# Altium PCB PCB6.PcbDoc
Units mil, origin at the board's own origin, x right, y up, seen from the top; angles counter-clockwise.
Board outline 5000 x 3000 mil, 2 copper layers (Top Layer, Bottom Layer); 20 components, 9 nets, 66 pads, 0 vias.
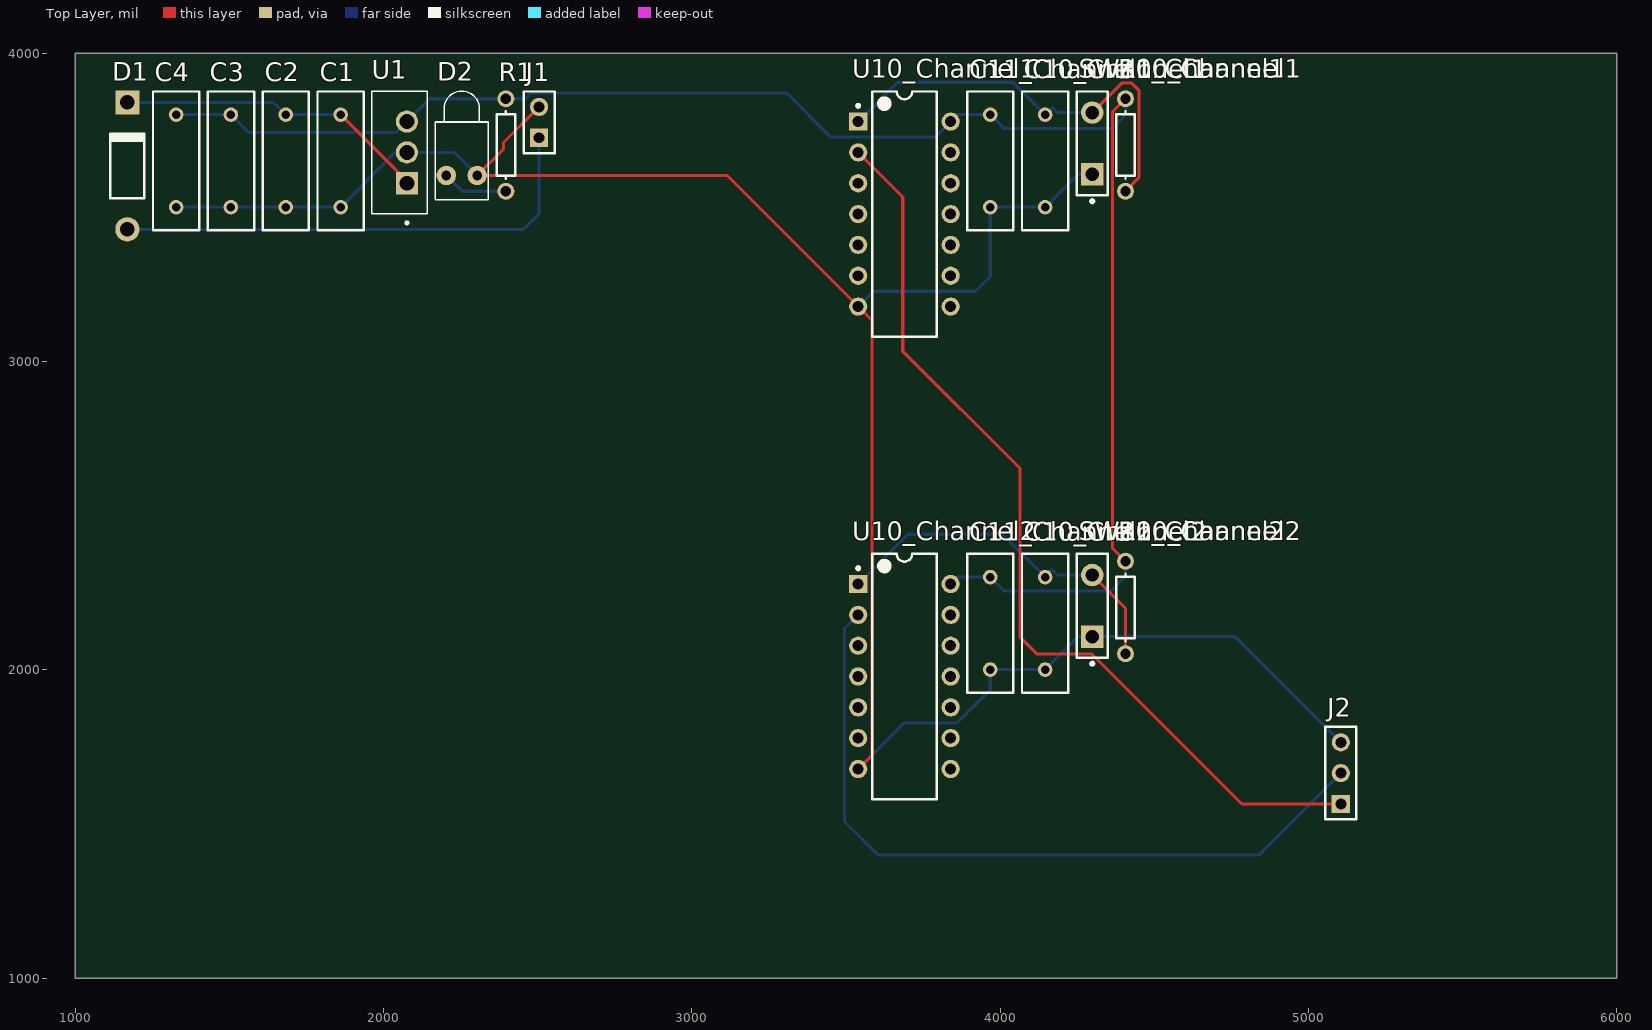
[diagram p0: Top Layer view]
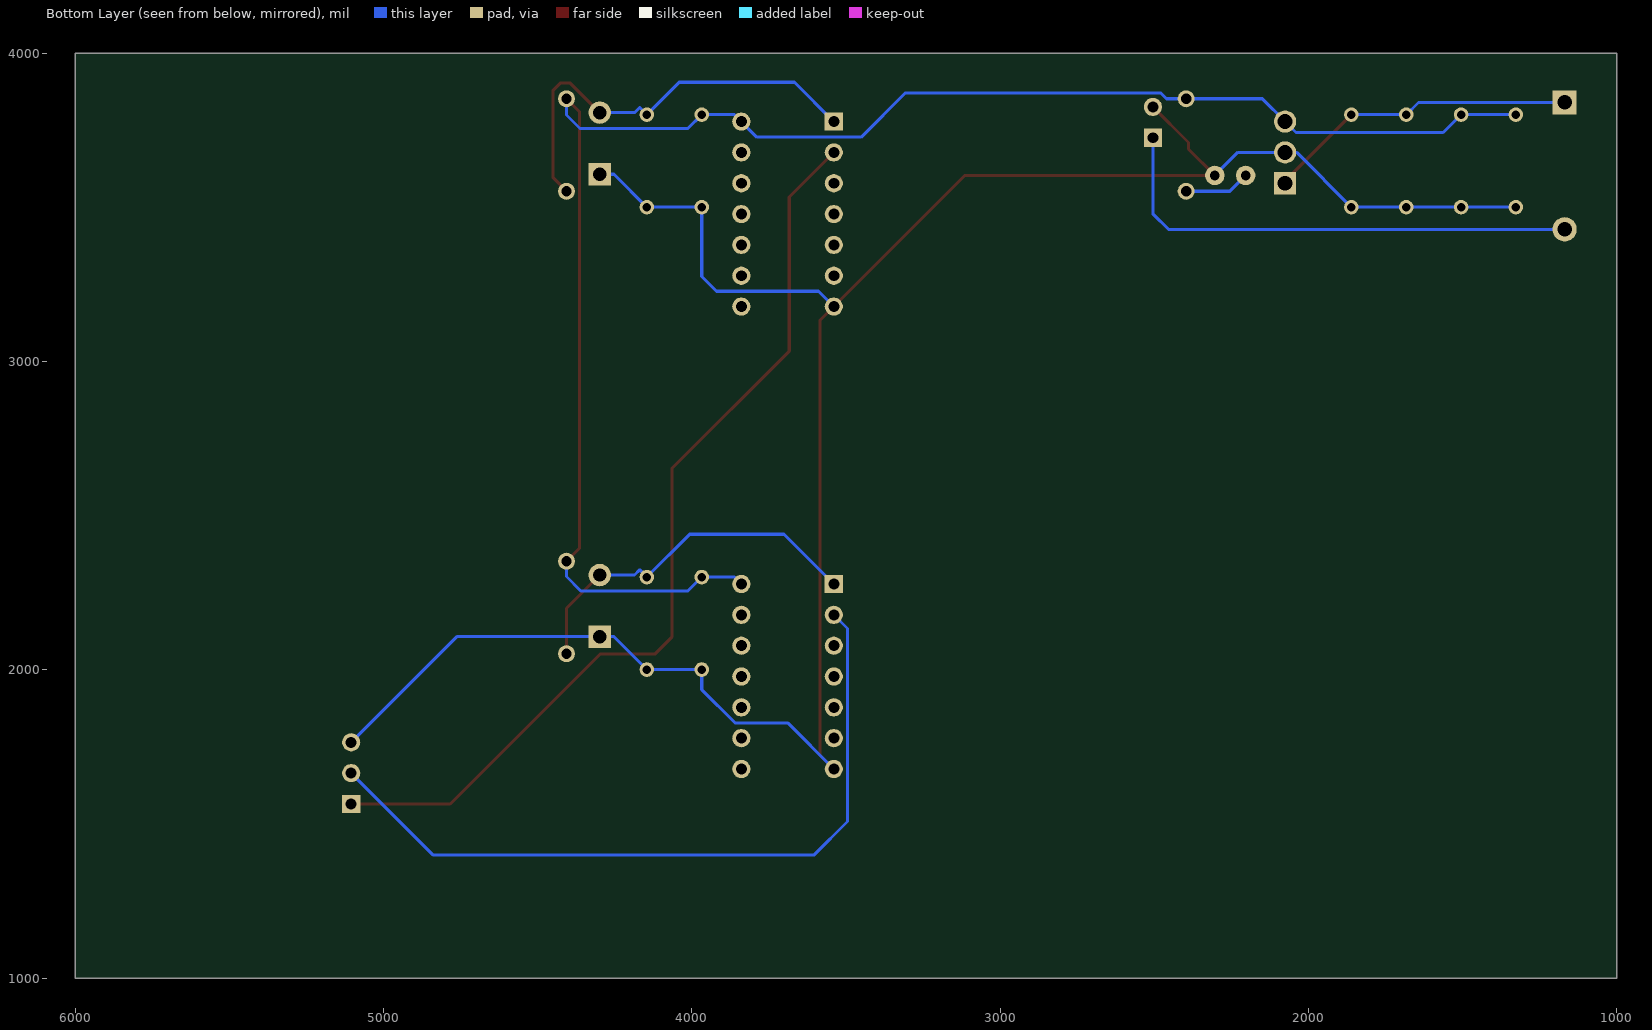
[diagram p1: Bottom Layer view, seen from below]

## Layer stack, top to bottom
Top Solder: solder mask 0.4, Solder Resist, Dk 3.5
Top Layer: signal copper 1.4
Dielectric 1: dielectric 12.6, FR-4, Dk 4.8
Bottom Layer: signal copper 1.4
Bottom Solder: solder mask 0.4, Solder Resist, Dk 3.5

## Board outline
1000,1000 6000,1000 6000,4000 1000,4000

## Design rules (kind name [scope] priority, off if disabled: settings)
Clearance [All] p1: gap=10 ignorepadtopadclearanceinfootprint=FALSE
PolygonConnect [All] p1: connectstyle=Relief reliefconductorwidth=10 reliefentries=4 polygonreliefangle="90 Angle" airgapwidth=10
RoomDefinition "Room Power (Power)" [InComponentClass('Power') vs True] p1: confinementstyle=ConfineIn formatcopy=TRUE lockcomponents=FALSE outline 1100,1100 3300,1100 3300,3900 1100,3900
RoomDefinition "Room Channel1 (Channel1)" [InComponentClass('Channel1') vs True] p2: confinementstyle=ConfineIn formatcopy=TRUE lockcomponents=FALSE outline 3500,2500 5900,2500 5900,3900 3500,3900
RoomDefinition "Room Channel2 (Channel2)" [InComponentClass('Channel2') vs True] p3: confinementstyle=ConfineIn formatcopy=TRUE lockcomponents=FALSE outline 3500,1100 5900,1100 5900,2400 3500,2400
RoutingVias [All] p1: holewidth=28 width=50 viastyle="Through Hole" minholewidth=28 minwidth=50 maxholewidth=28 maxwidth=50
SolderMaskExpansion [All] p1: expansion=0 istentingtop=FALSE
SupplyNets "Schematic Supply Nets_1" [InNet('GND')] p1: voltage=0.000
SupplyNets "Schematic Supply Nets" [InNet('VCC')] p2: voltage=0.000
Width [All] p1: maxlimit=10 minlimit=10 preferedwidth=10
30 further rules are at their usual default settings.

## Classes and differential pairs
channel class Channel: Channel1 Channel2
component class Top: J2
component class Power: C1 C2 C3 C4 D1 D2 J1 R1 U1
component class Channel2: C10_Channel2 C11_Channel2 R10_Channel2 SW10_Channel2 U10_Channel2
component class Channel1: C10_Channel1 C11_Channel1 R10_Channel1 SW10_Channel1 U10_Channel1

## Components (designator, comment, footprint, x,y, rotation, side; value= is the part's Value field where it differs from the comment)
C1 "Cap" RAD-0.3 1860.67,3651.06 r90 top value=10uF
C2 "Cap" RAD-0.3 1682.8,3651.06 r90 top value=100nF
C3 "Cap" RAD-0.3 1504.92,3651.06 r90 top value=100nF
C4 "Cap" RAD-0.3 1327.05,3651.06 r90 top value=10uF
C10_Channel1 "Cap" RAD-0.3 4145.87,3651.06 r90 top value=100nF (schematic designator C10)
C10_Channel2 "Cap" RAD-0.3 4145.87,2151.06 r90 top value=100nF (schematic designator C10)
C11_Channel1 "Cap" RAD-0.3 3967.99,3651.06 r90 top value=100nF (schematic designator C11)
C11_Channel2 "Cap" RAD-0.3 3967.99,2151.06 r90 top value=100nF (schematic designator C11)
D1 "Diode 1N4007" DO-41 1169.06,3634.72 r90 top
D2 "LED1" LED-1 2253.64,3603.88 r90 top
J1 "Header 2" HDR1X2 2504.57,3726.06 r90 top
J2 "Header 3" HDR1X3 5105,1565 r90 top
R1 "Res1" AXIAL-0.3 2396.69,3702.44 r90 top value=1k
R10_Channel1 "Res1" AXIAL-0.3 4406.61,3702.44 r90 top value=10k (schematic designator R10)
R10_Channel2 "Res1" AXIAL-0.3 4406.61,2202.44 r90 top value=10k (schematic designator R10)
SW10_Channel1 "SW-PB" SPST-2 4298.74,3707.56 r90 top (schematic designator SW10)
SW10_Channel2 "SW-PB" SPST-2 4298.74,2207.56 r90 top (schematic designator SW10)
U1 "LM7805T" TO254P1011X457X1950-3 2052.07,3678.48 r90 top
U10_Channel1 "74HC14" DIP-14 3689.53,3478.43 r0 top (schematic designator U10)
U10_Channel2 "74HC14" DIP-14 3689.53,1978.43 r0 top (schematic designator U10)

## Footprints (in the part's own frame and the unit in brackets; to place one, negate y for a bottom-side part, rotate by r counter-clockwise, add the part's x,y. Pads: shape width x height; smd on the part's side, far side on the other; paste and mask are expansions set on the pad)
AXIAL-0.3 [mm] "Axial Device, Thru-Hole; 2 Leads; 0.3 in Pin Spacing"
  round 1.4 hole 0.85: 1(-3.81,0) 2(3.81,0)
  silkscreen extent -2.77,-0.76 2.77,0.76
DIP-14 [mm] "DIP; 14 Leads; Row Spacing 7.62 mm; Pitch 2.54 mm"
  rect 1.5x1.5 hole 0.9: 1(-3.81,7.62)
  round 1.5 hole 0.9: 2(-3.81,5.08) 3(-3.81,2.54) 4(-3.81,0) 5(-3.81,-2.54) 6(-3.81,-5.08) 7(-3.81,-7.62) 8(3.81,-7.62) 9(3.81,-5.08) 10(3.81,-2.54) 11(3.81,0) 12(3.81,2.54) 13(3.81,5.08) 14(3.81,7.62)
  silkscreen extent -3.93,-10.1 2.65,10.1, body extent -3.6,-10.1 3.6,10.1, height 5.08
DO-41 [mm] "Diode, Axial; Body 5.2 x 2.7 mm (LxDia. max), Lead Dia. 0.86 mm (max)"
  round 2 hole 1.2: 1(-5.23,0)
  rect 2x2 hole 1.2: 2(5.23,0)
  silkscreen extent -2.65,-1.4 2.75,1.4
HDR1X2 [mm] "Connector; Header; 2 Position"
  rect 1.5x1.5 hole 0.9: 1(0,0)
  round 1.5 hole 0.9: 2(2.54,0)
  silkscreen extent -1.27,-1.27 3.81,1.27
HDR1X3 [mm] "Connector; Header; 3 Position"
  rect 1.5x1.5 hole 0.9: 1(0,0)
  round 1.5 hole 0.9: 2(2.54,0) 3(5.08,0)
  silkscreen extent -1.27,-1.27 6.35,1.27
LED-1 [mm] "LED; 2 Leads"
  round 1.6 hole 0.8: 1(0,1.27) 2(0,-1.27)
  silkscreen extent -2,-2.2 6.95,2.2
RAD-0.3 [mm] "Radial Cap, Thru-Hole; 2 Leads; 0.3 in Pin Spacing"
  round 1.2 hole 0.7: 1(-3.81,0) 2(3.81,0)
  silkscreen extent -5.71,-1.91 5.72,1.9
SPST-2 [mm] "Switch; 2 Leads"
  rect 1.85x1.85 hole 1.1: 1(-2.54,0)
  round 1.85 hole 1.1: 2(2.54,0)
  silkscreen extent -4.89,-1.27 4.28,1.27
TO254P1011X457X1950-3 [mm]
  rect 1.83x1.83 / inner round 1.83 / far side rect 1.83x1.83 hole 1.22 mask+0.102: 1(-2.54,-0.6)
  round 1.83 hole 1.22 mask+0.102: 2(0,-0.6) 3(2.54,-0.6)
  silkscreen extent -5.9,-2.29 5.05,2.29, body extent -5.08,-2.28 5.08,2.28, height 19.5

## Part data
C1: "Capacitor 10 uF (entrada)", Manufacturer=KEMET, Manufacturer Part Number=C320C106K3R5TA, LatestRevisionDate=17-Jul-2002, LatestRevisionNote="Re-released for DXP Platform.", PackageDescription="Radial Cap, Thru-Hole; 2 Leads; 0.3 in Pin Spacing", PackageReference=RAD-0.3, Published=8-Jun-2000, Publisher="Altium Limited"
C2: "Capacitor 100 nF (entrada)", Manufacturer=KEMET, Manufacturer Part Number=C320C104K5R5TA, LatestRevisionDate=17-Jul-2002, LatestRevisionNote="Re-released for DXP Platform.", PackageDescription="Radial Cap, Thru-Hole; 2 Leads; 0.3 in Pin Spacing", PackageReference=RAD-0.3, Published=8-Jun-2000, Publisher="Altium Limited"
C3: "Capacitor 100 nF (salida)", Manufacturer=KEMET, Manufacturer Part Number=C320C104K5R5TA, LatestRevisionDate=17-Jul-2002, LatestRevisionNote="Re-released for DXP Platform.", PackageDescription="Radial Cap, Thru-Hole; 2 Leads; 0.3 in Pin Spacing", PackageReference=RAD-0.3, Published=8-Jun-2000, Publisher="Altium Limited"
C4: "Capacitor 10 uF (salida)", Manufacturer=KEMET, Manufacturer Part Number=C320C106K3R5TA, LatestRevisionDate=17-Jul-2002, LatestRevisionNote="Re-released for DXP Platform.", PackageDescription="Radial Cap, Thru-Hole; 2 Leads; 0.3 in Pin Spacing", PackageReference=RAD-0.3, Published=8-Jun-2000, Publisher="Altium Limited"
C10_Channel1 C10_Channel2: "Capacitor 100 nF (debounce)", Manufacturer=KEMET, Manufacturer Part Number=C320C104K5R5TA, LatestRevisionDate=17-Jul-2002, LatestRevisionNote="Re-released for DXP Platform.", PackageDescription="Radial Cap, Thru-Hole; 2 Leads; 0.3 in Pin Spacing", PackageReference=RAD-0.3, Published=8-Jun-2000, Publisher="Altium Limited"
C11_Channel1 C11_Channel2: "Capacitor 100 nF (desacople U10)", Manufacturer=KEMET, Manufacturer Part Number=C320C104K5R5TA, LatestRevisionDate=17-Jul-2002, LatestRevisionNote="Re-released for DXP Platform.", PackageDescription="Radial Cap, Thru-Hole; 2 Leads; 0.3 in Pin Spacing", PackageReference=RAD-0.3, Published=8-Jun-2000, Publisher="Altium Limited"
D1: "Diodo de proteccion de polaridad inversa", Manufacturer="Diodes Inc.", Manufacturer Part Number=1N4007, Code_JEDEC=DO-204-AL, ComponentLink1Description="Manufacturer Link", ComponentLink1URL=http://www.fairchildsemi.com/, ComponentLink2Description=Datasheet, ComponentLink2URL=http://www.fairchildsemi.com/ds/1N%2F1N4001.pdf, DatasheetVersion=1998, LatestRevisionDate=17-Jul-2002, LatestRevisionNote="Re-released for DXP Platform.", PackageDescription="Diode, Axial; Body 5.2 x 2.7 mm (LxDia. max), Lead Dia. 0.86 mm (max)", PackageReference=DO-41, PackageVersion=Aug-1999, Published=8-Jun-2000, Publisher="Altium Limited"
D2: "LED rojo 5 mm (encendido)", Manufacturer=Kingbright, Manufacturer Part Number=WP7113ID, LatestRevisionDate=08-Jul-2005, LatestRevisionNote="Mech Layer 1 removed.", PackageDescription="LED; 2 Leads", PackageReference=LED-1, Published=8-Jun-2000, Publisher="Altium Limited"
J1: "Header 2 pin: Vin (7-12 V) y GND", Manufacturer=Generic, Manufacturer Part Number="Pin header 1x2", LatestRevisionDate=17-Jul-2002, LatestRevisionNote="Re-released for DXP Platform.", Publisher="Altium Limited"
J2: "Header 3 pin: OUT1, OUT2, GND", Manufacturer=Generic, Manufacturer Part Number="Pin header 1x3", LatestRevisionDate=17-Jul-2002, LatestRevisionNote="Re-released for DXP Platform.", Publisher="Altium Limited"
R1: "Resistor 1 kohm 1/4 W (LED)", Manufacturer=Yageo, Manufacturer Part Number=CFR-25JB-52-1K, LatestRevisionDate=17-Jul-2002, LatestRevisionNote="Re-released for DXP Platform.", PackageDescription="Axial Device, Thru-Hole; 2 Leads; 0.3 in Pin Spacing", PackageReference=AXIAL-0.3, Published=8-Jun-2000, Publisher="Altium Limited"
R10_Channel1 R10_Channel2: "Resistor 10 kohm (pull-up)", Manufacturer=Yageo, Manufacturer Part Number=CFR-25JB-52-10K, LatestRevisionDate=17-Jul-2002, LatestRevisionNote="Re-released for DXP Platform.", PackageDescription="Axial Device, Thru-Hole; 2 Leads; 0.3 in Pin Spacing", PackageReference=AXIAL-0.3, Published=8-Jun-2000, Publisher="Altium Limited"
SW10_Channel1 SW10_Channel2: "Pulsador normalmente abierto", Manufacturer=Generic, Manufacturer Part Number="Tactile 6x6", LatestRevisionDate=17-Jul-2002, LatestRevisionNote="Re-released for DXP Platform.", PackageDescription="Switch; 2 Leads", PackageReference=SPST-2, Published=24-Mar-1999, Publisher="Altium Limited"
U1: "Regulador lineal fijo 5 V, 1.5 A, TO-220", Manufacturer=STMicroelectronics, Manufacturer Part Number=L7805CV, Package="TO-220-3 TAEJIN", Check_prices=https://www.snapeda.com/parts/LM7805T/TAEJIN/view-part/?ref=eda, MF=TAEJIN, MP=LM7805T, SnapEDA_Link=https://www.snapeda.com/parts/LM7805T/TAEJIN/view-part/?ref=snap
U10_Channel1 U10_Channel2: "Hex Schmitt-trigger inverter, 6 gates (A-F) + power part G (VCC=14, GND=7)", Manufacturer="Texas Instruments", Manufacturer Part Number=SN74HC14N

## Nets (pads, with @x,y where several pads share a name; then routed paths per layer and width w, separated by ;. In a path a pad name is that pad's centre, name@x,y a point inside that pad or via, vN(x,y) a via of type N, cw(c..) or ccw(c..) an arc to the next point about the centre after c; other vN are vias at no path point)
BTN_Channel1: C10_Channel1.2 R10_Channel1.1 SW10_Channel1.2 U10_Channel1.1 | length 1418.1
  Top Layer w10: SW10_Channel1.2 4394.36,3903.18 4426.82,3903.18 4450,3880 4450,3595.83 R10_Channel1.1
  Bottom Layer w10: U10_Channel1.1 3667.1,3906 4040.93,3906 C10_Channel1.2 4169.11,3824.31 4185.87,3807.56 SW10_Channel1.2
BTN_Channel2: C10_Channel2.2 R10_Channel2.1 SW10_Channel2.2 U10_Channel2.1 | length 1200.1
  Top Layer w10: SW10_Channel2.2 4406.61,2199.69 R10_Channel2.1
  Bottom Layer w10: U10_Channel2.1 3701.1,2440 4006.93,2440 C10_Channel2.2 4169.11,2324.31 4185.87,2307.56 SW10_Channel2.2
GND: C1.1 C2.1 C3.1 C4.1 C10_Channel1.1 C10_Channel2.1 C11_Channel1.1 C11_Channel2.1 D2.2 J1.2 J2.3 SW10_Channel1.1 SW10_Channel2.1 U1.2 U10_Channel1.7 U10_Channel2.7 | length 7328.2
  Top Layer w10: J1.2 2389,3710.5 2389,3689.24 D2.2 3114.08,3603.88 U10_Channel1.7 3585,3132.95 3585,1723.9 U10_Channel2.7
  Bottom Layer w10: C4.1 C3.1 C2.1 C1.1 2038.09,3678.48 U1.2 2229.04,3678.48 D2.2 ; U10_Channel2.7 3689.1,1828 3860,1828 3967.99,1935.99 C11_Channel2.1 C10_Channel2.1 4252.36,2107.56 SW10_Channel2.1 4762.44,2107.56 J2.3 ; U10_Channel1.7 3589.1,3228 3920,3228 3967.99,3275.99 C11_Channel1.1 C10_Channel1.1 4252.36,3607.56 SW10_Channel1.1
NetD2_1: D2.1 R1.1 | length 214.4
  Bottom Layer w10: D2.1 2255.08,3552.44 R1.1
OUT_Channel1: J2.1 U10_Channel1.2 | length 3054.2
  Top Layer w10: U10_Channel1.2 3684,3533.95 3684,3034 4065,2653 4065,2106 4120,2051 4298,2051 4784,1565 J2.1
OUT_Channel2: J2.2 U10_Channel2.2 | length 2453.4
  Bottom Layer w10: U10_Channel2.2 3495,2133.9 3495,1508 3603,1400 4840,1400 J2.2
VCC: C3.2 C4.2 C11_Channel1.2 C11_Channel2.2 R1.2 R10_Channel1.2 R10_Channel2.2 U1.3 U10_Channel1.14 U10_Channel2.14 | length 5535
  Top Layer w10: R10_Channel2.2 4364,2395.06 4364,3809.83 R10_Channel1.2
  Bottom Layer w10: C4.2 C3.2 1562.99,3743 2040.2,3743 U1.3 2149.65,3852.44 R1.2 2460.44,3852.44 2479,3871 3308,3871 3451,3728 3789.1,3728 U10_Channel1.14 3862.17,3801.06 C11_Channel1.2 4013.06,3756 4362.61,3756 4406.61,3800 R10_Channel1.2 ; U10_Channel2.14 3862.17,2301.06 C11_Channel2.2 4013.06,2256 4360,2256 4406.61,2302.61 R10_Channel2.2
VIN: D1.1 J1.1 | length 1603
  Bottom Layer w10: D1.1 2453.82,3428.82 2504.57,3479.57 J1.1
VIND: C1.2 C2.2 D1.2 U1.1 | length 1019.6
  Top Layer w10: C1.2 2075.69,3586.05 U1.1
  Bottom Layer w10: D1.2 1643.23,3840.63 C2.2 C1.2
pads on no net: U10_Channel1.3 U10_Channel1.4 U10_Channel1.5 U10_Channel1.6 U10_Channel1.8 U10_Channel1.9 U10_Channel1.10 U10_Channel1.11 U10_Channel1.12 U10_Channel1.13 U10_Channel2.3 U10_Channel2.4 U10_Channel2.5 U10_Channel2.6 U10_Channel2.8 U10_Channel2.9 U10_Channel2.10 U10_Channel2.11 U10_Channel2.12 U10_Channel2.13